# Altium PCB PCB_assembly_drawing_try2.PcbDoc (part 5 of 5)
Units mm, origin at the board's own origin, x right, y up, seen from the top; angles counter-clockwise.
Board outline 187.5 x 240 mm, 2 copper layers (Top Layer, Bottom Layer), stack 2.8 mm thick; 485 components, 419 nets, 1569 pads, 683 vias.
Unrouted connection lines stored in the file: 11.
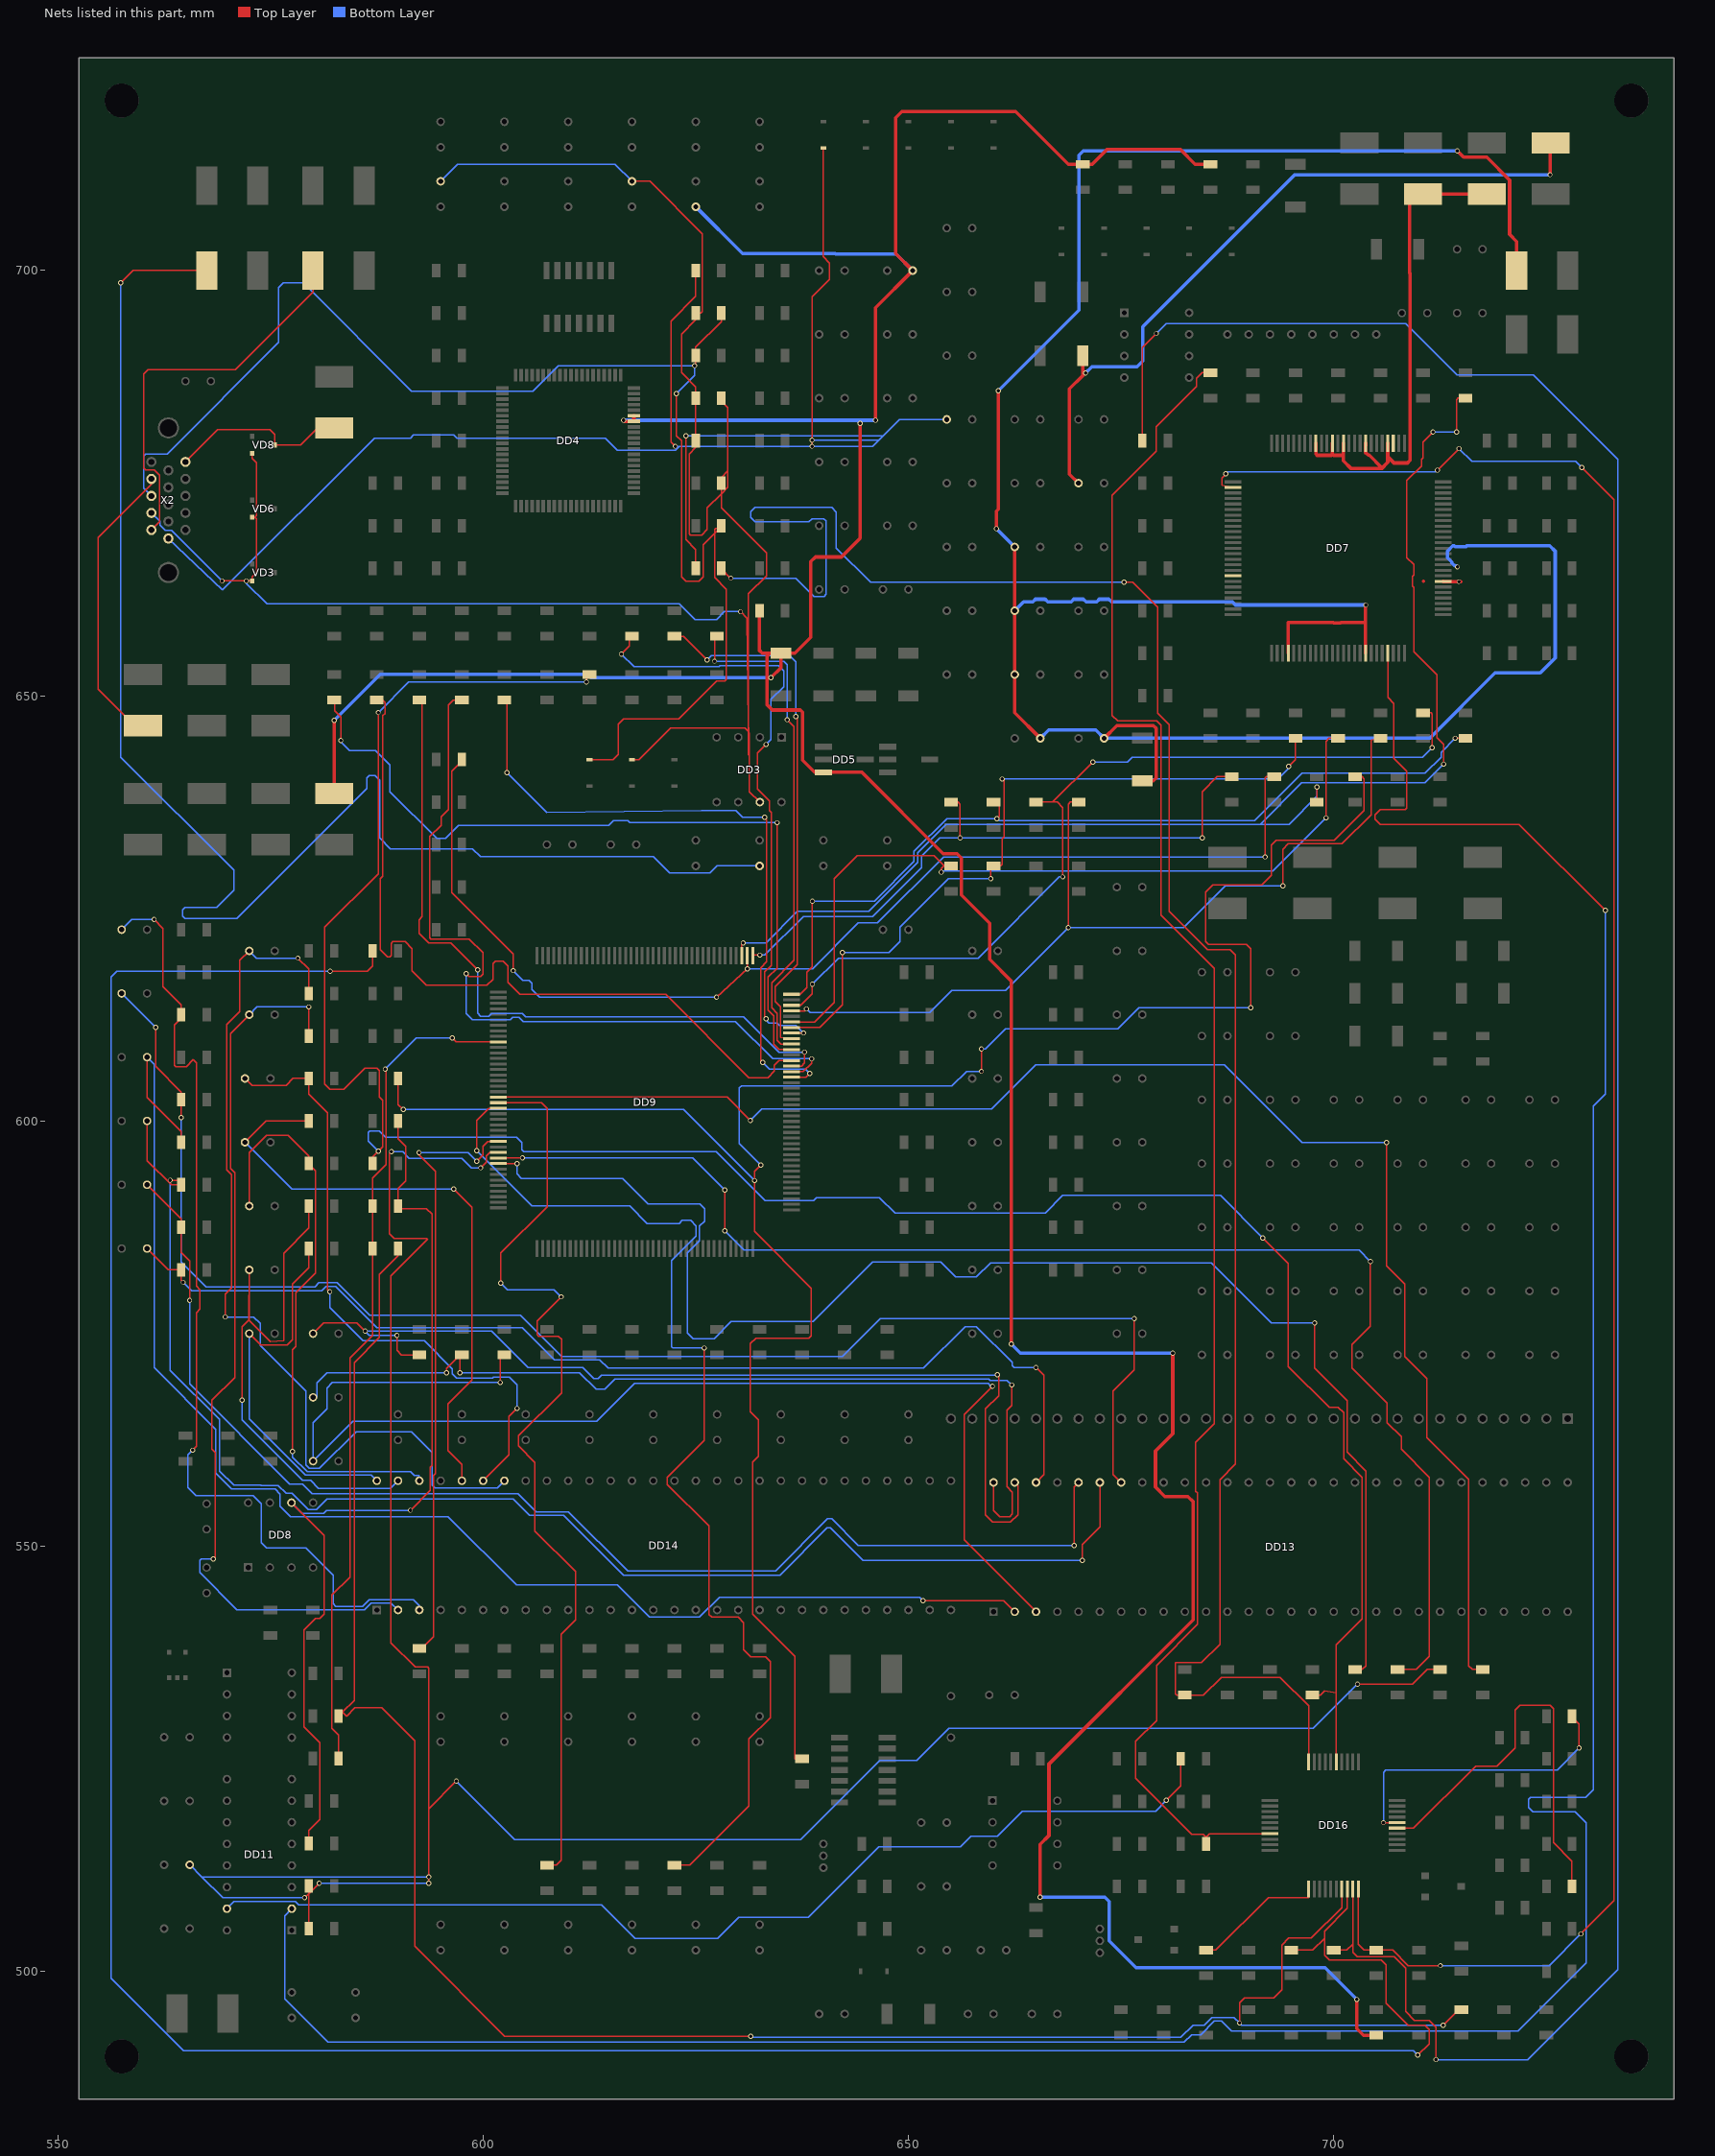
[diagram p5: the nets of this part, all layers, seen from the top]

## Via types
v1: diameter 0.6, hole 0.4, Top Layer to Bottom Layer, 677 vias
v2: diameter 0.5, hole 0.4, Top Layer to Bottom Layer, 3 vias
v3: diameter 0.4, hole 0.4, Top Layer to Bottom Layer, 2 vias
v4: diameter 0.6, hole 0.3, Top Layer to Bottom Layer, 1 vias

## Nets (pads, with @x,y where several pads share a name; then routed paths per layer and width w, separated by ;. In a path a pad name is that pad's centre, name@x,y a point inside that pad or via, vN(x,y) a via of type N, cw(c..) or ccw(c..) an arc to the next point about the centre after c; other vN are vias at no path point) (continued)
O3_3V: C43.1 C46.2 C48.2 C51.2 C53.2 C54.2 DD7.18 DD7.29 DD7.43 DD7.57 DD7.78 L14.2 | length 309.2
  Top Layer w0.4: v1(660.349,669.651) 660.349,671.706 660.571,671.928 v1(660.571,685.87) ; C54.2@662.5,667.5 C53.2@662.5,660 C51.2@662.5,652.5 662.5,648 C48.2@665.5,645 ; C46.2@673,645 674.506,646.506 678.79,646.506 679.12,646.176 679.12,640.334 678.786,640 C43.1@677.5,640 ; DD7.29@694.65,655 694.65,658.6 699.934,658.6 699.989,658.545 700.811,658.545 700.866,658.6 703.7,658.6 703.75,658.55 ; DD7.43@703.75,655 703.75,658.55 ; v1(703.758,660.679) 703.75,660.672 703.75,658.55 ; DD7.57@712.85,663.45 712.881,663.419 v2@714.944,663.419 ; v1(714.527,714.07) 715.264,713.334 717.982,713.334 720.674,710.641 720.674,704.253 721.5,703.428 L14.2@721.5,700
  Bottom Layer w0.4: v1(660.349,669.651) C54.2@662.5,667.5 ; v1(660.571,685.87) 670.052,695.35 670.052,713.562 670.56,714.07 v1(714.527,714.07) ; C53.2@662.5,660 663.535,661.035 664.615,661.035 664.938,661.358 666.063,661.358 666.363,661.058 669.137,661.058 669.437,661.358 670.562,661.358 670.885,661.035 672.114,661.035 672.437,661.358 673.562,661.358 673.885,661.035 688.086,661.035 688.442,660.679 v1(703.758,660.679) ; C48.2@665.5,645 666.473,645.973 672.027,645.973 C46.2@673,645 711.294,645 718.972,652.678 724.281,652.678 726.034,654.431 726.034,667.004 725.399,667.639 715.648,667.639 715.547,667.538 714.253,667.538 714.152,667.639 713.994,667.639 713.359,667.004 713.359,666.25 713.892,665.716 713.892,665.615 714.248,665.259 714.418,665.259 v1(714.535,665.142)
  other v2: 714.7,663.4
OSD_B: DD9.22 R190.2 | length 131.9
  Top Layer w0.15: v1(599.237,596.519) 599.237,600.075 600.662,601.5 DD9.22@601.8,601.5 ; R190.2@622.5,512.5 624.307,512.5 631.241,519.434 631.241,527.329 633.755,529.844 633.755,536.448 633.197,537.007 631.444,537.007 630.606,537.845 630.606,541.02 629.971,541.655 626.872,541.655 626.542,541.985 626.542,552.375 621.671,557.246 621.671,558.12 625.983,562.432 v1(625.983,573.303)
  Bottom Layer w0.15: v1(599.237,596.519) 605.717,590.038 617.22,590.038 619.299,587.959 623.068,587.959 623.418,588.309 624.389,588.309 625.033,587.664 625.033,586.486 622.148,583.6 622.148,573.456 622.3,573.303 v1(625.983,573.303)
OSD_CLK: C131.1 DD9.30 R175.2 R176.2 R193.2 | length 302.7
  Top Layer w0.15: v1(579.018,508.66) 579.5,509.142 ; R176.2@579.5,505.04 579.5,509.142 ; R175.2@579.5,510.04 579.5,509.142 ; v1(580.72,510.362) 579.5,509.142 ; v1(589.229,596.392) 589.001,596.163 589.001,586.74 589.534,586.207 593.395,586.207 593.471,586.13 589.153,581.812 589.153,538.658 592.023,535.788 593.471,535.788 593.598,535.661 593.598,519.125 ; v1(593.598,510.362) v1(593.598,511.124) 593.598,519.125 ; v1(596.849,522.376) 593.598,519.125 ; v1(599.721,594.499) 600.362,595.14 600.362,595.866 600.796,596.3 DD9.30@601.8,596.3 ; v1(702.793,533.781) 709.27,533.781 710.989,535.5 R193.2@712.5,535.5
  Bottom Layer w0.15: C131.1@565.5,512.54 566.916,511.124 ; v1(579.018,508.66) 569.38,508.66 566.916,511.124 ; v1(580.72,510.362) v1(593.598,510.362) ; v1(589.229,596.392) 590.55,596.392 591.312,595.63 597.473,595.63 598.604,594.499 v1(599.721,594.499) ; v1(593.598,511.124) 566.916,511.124 ; v1(596.849,522.376) 603.707,515.518 637.337,515.518 646.633,524.815 651.002,524.815 654.761,528.574 697.586,528.574 v1(702.793,533.781)
OSD_G: DD9.21 R191.2 | length 114
  Top Layer w0.15: DD9.21@601.8,602.15 606.839,602.15 607.517,601.472 607.517,589.915 602.082,584.479 v1(602.082,580.923) ; R191.2@607.5,512.5 608.588,512.5 609.168,513.08 609.168,539.648 610.845,541.325 610.845,547.04 606.095,551.79 606.095,559.867 604.171,561.791 604.171,562.998 609.219,568.046 609.219,574.319 608.838,574.7 606.552,574.7 606.349,574.904 606.349,576.478 v1(609.194,579.323)
  Bottom Layer w0.15: v1(602.082,580.923) 602.844,580.161 608.355,580.161 v1(609.194,579.323)
OSD_HS: DD9.31 R194.2 | length 165.8
  Top Layer w0.15: DD9.31@601.8,595.65 v1(604.626,595.65) ; v1(628.396,587.096) v1(628.396,591.871) ; v1(704.317,583.489) 704.317,575.855 702.171,573.71 702.171,570.941 706.272,566.84 706.272,564.54 707.946,562.867 707.946,561.426 711.251,558.121 711.251,537.032 709.719,535.5 R194.2@707.5,535.5
  Bottom Layer w0.15: v1(604.626,595.65) 624.617,595.65 v1(628.396,591.871) ; v1(628.396,587.096) 630.657,584.835 702.97,584.835 v1(704.317,583.489)
OSD_R: DD9.20 R192.2 | length 179.4
  Top Layer w0.15: DD9.20@601.8,602.8 628.697,602.8 v1(631.427,600.07) ; v1(706.196,597.459) 706.196,582.955 708.33,580.822 708.33,572.313 710.946,569.697 710.946,562.762 715.848,557.86 715.848,535.932 716.28,535.5 R192.2@717.5,535.5
  Bottom Layer w0.15: v1(631.427,600.07) 632.778,601.421 659.79,601.421 664.972,606.603 687.121,606.603 696.265,597.459 v1(706.196,597.459)
OSD_VS: DD9.32 R195.2 | length 169
  Top Layer w0.15: DD9.32@601.8,595 603.987,595 v1(603.992,594.995) ; v1(697.763,576.25) 697.763,570.941 701.571,567.134 701.571,561.061 703.783,558.848 703.783,535.94 703.343,535.5 R195.2@702.5,535.5
  Bottom Layer w0.15: v1(603.992,594.995) 603.992,593.781 604.52,593.253 616.376,593.253 619.383,590.245 625.475,590.245 626.034,589.686 626.034,588.239 625.437,587.642 625.437,585.902 624.027,584.492 624.027,575.056 624.662,574.421 627.151,574.421 629.158,576.428 638.785,576.428 645.795,583.438 653.796,583.438 655.574,581.66 657.987,581.66 659.663,583.336 685.597,583.336 692.683,576.25 v1(697.763,576.25)
P3_3V: C41.1 C44.2 L15.2 | length 87
  Top Layer w0.4: C44.2@670,675 668.934,676.066 668.934,686.079 670.5,687.645 670.5,688.273 ; C41.1@670.5,690 670.5,688.273 ; v1(670.814,687.959) 670.5,688.273 ; v1(725.424,711.276) 725.424,715 L15.2@725.5,715
  Bottom Layer w0.4: v1(670.814,687.959) 671.551,688.696 676.885,688.696 677.545,689.356 677.545,693.395 695.427,711.276 v1(725.424,711.276)
P3V3: C16.2 C38.1 C40.1 DD4.34 DD4.35 DD5.3 L12.1 R22.1 R52.1 R53.1 R237.2 | length 492.3
  Top Layer w0.4: v1(582.498,647.116) 582.498,638.5 L12.1@582.5,638.5 ; v1(616.506,682.396) 616.628,682.275 DD4.34@617.722,682.275 DD4.35@617.722,682.925 ; R22.1@632.5,660 632.5,655.32 632.82,655 633.73,655 ; v1(633.832,652.124) 635,653.292 C40.1@635,655 ; v1(644.325,682.037) 644.325,668.528 642.115,666.318 639.064,666.318 638.531,665.785 638.531,656.88 636.651,655 C40.1@635,655 ; v1(646.142,682.396) 646.142,695.642 C38.1@650.5,700 648.504,701.996 648.504,717.973 649.224,718.693 662.61,718.693 668.803,712.5 R52.1@670.5,712.5 671.601,712.5 673.324,714.223 681.995,714.223 683.717,712.5 R53.1@685.5,712.5 ; v1(662.102,573.786) 662.102,616.458 659.536,619.023 659.536,623.265 656.209,626.593 656.209,630.936 655.701,631.444 654.081,631.444 644.525,641 DD5.3@640,641 638.974,641 637.551,642.424 637.551,648.062 637.286,648.327 633.984,648.327 633.4,648.911 633.4,654.67 633.73,655 ; v1(665.48,508.737) 665.48,514.934 666.521,515.976 666.521,524.392 683.454,541.325 683.454,555.244 682.861,555.837 680.152,555.837 679.044,556.946 679.044,561.213 681.076,563.245 v1(681.076,572.719) ; v1(702.716,496.697) 702.716,493.268 703.484,492.5 R237.2@705,492.5 ; 633.73,655 C40.1@635,655
  Bottom Layer w0.4: v1(582.498,647.116) 587.908,652.526 612.294,652.526 612.696,652.124 v1(633.832,652.124) ; v1(616.506,682.396) 643.966,682.396 ; C16.2@625,707.5 630.488,702.012 641.382,702.012 641.44,701.955 648.545,701.955 C38.1@650.5,700 ; v1(644.325,682.037) 643.966,682.396 ; v1(646.142,682.396) 643.966,682.396 ; v1(662.102,573.786) 663.169,572.719 v1(681.076,572.719) ; v1(665.48,508.737) 673.1,508.737 673.608,508.229 673.608,503.58 676.766,500.423 698.991,500.423 v1(702.716,496.697)
PD: DD7.2 DD16.30 R228.2 | length 257.8
  Top Layer w0.15: v1(687.3,676.1) 687.3,676.073 686.841,675.615 686.841,674.729 DD7.2@688.15,674.5 ; DD16.30@702.9,509.7 702.9,503.18 703.58,502.5 R228.2@705,502.5 706.934,502.5 708.749,500.685 v1(712.546,500.685) ; v1(712.191,676.529) v1(714.731,679.069) ; v1(729.056,504.419) 732.968,508.33 732.968,673.049 v1(729.183,676.834)
  Bottom Layer w0.15: v1(687.3,676.1) 687.327,676.1 687.553,676.326 711.987,676.326 v1(712.191,676.529) ; v1(712.546,500.685) 725.322,500.685 v1(729.056,504.419) ; v1(714.731,679.069) 716.229,677.57 728.447,677.57 v1(729.183,676.834)
PDO: DD16.29 R57.2 R227.2 | length 308.1
  Top Layer w0.15: R57.2@677.5,680 677.5,690.956 v1(679.151,692.607) ; R227.2@700,502.5 701.548,502.5 702.25,503.202 ; DD16.29@702.25,509.7 702.25,503.202 ; v1(712.013,489.636) 712.013,493.446 711.2,494.259 709.498,494.259 708.457,495.3 708.457,500.405 707.137,501.725 702.767,501.725 702.25,502.242 702.25,503.202
  Bottom Layer w0.15: v1(679.151,692.607) 680.294,693.75 708.482,693.75 714.527,687.705 723.468,687.705 733.374,677.799 733.374,500.202 722.808,489.636 v1(712.013,489.636)
PKA_GND: DD7.79 DD7.83 DD7.87 DD7.89 DD7.92 L16.2 L17.2 | length 63.5
  Top Layer w0.4: DD7.92@697.9,679.7 697.9,678.434 698.052,678.282 699.698,678.282 699.85,678.434 ; DD7.89@699.85,679.7 699.85,678.434 ; DD7.87@701.15,679.7 701.15,678.434 701.142,678.426 ; DD7.83@703.754,679.7 703.754,679.429 703.75,679.425 703.75,678.569 703.842,678.477 703.883,678.477 704.059,678.3 704.159,678.3 705.612,676.847 705.612,676.707 ; DD7.79@706.35,679.7 706.35,678.102 ; L16.2@718,709 L17.2@710.5,709 708.939,709 708.939,699.719 708.965,699.694 708.965,677.672 708.668,677.375 707.077,677.375 706.35,678.102 ; 699.85,678.434 700.002,678.282 700.998,678.282 701.142,678.426 ; 701.142,678.426 701.142,677.621 702.056,676.707 705.612,676.707 ; 705.612,676.707 706.35,677.445 706.35,678.102
POWER_ON_OFF: DD16.21 R211.2 | length 15.6
  Top Layer w0.15: R211.2@685,502.5 686.13,502.5 692.319,508.689 697.05,508.689 DD16.21@697.05,509.7
PSC0: DD16.35 R220.2 | length 49
  Top Layer w0.15: DD16.35@707.45,516.85 709.365,516.85 716.672,524.157 719.178,524.157 721.309,526.288 721.309,530.758 721.868,531.317 725.424,531.317 725.83,530.911 725.83,515.148 728,512.978 R220.2@728,510
PSC1: DD16.36 R210.2 | length 35.8
  Top Layer w0.15: v1(705.841,517.5) DD16.36@707.45,517.5 ; R210.2@728,530 728,529.946 728.853,529.093 v1(728.853,526.263)
  Bottom Layer w0.15: v1(705.841,517.5) 705.841,523.392 706.12,523.672 726.262,523.672 v1(728.853,526.263)
R_IN: L6.1 VD8.3 X2.1 | length 21.4
  Top Layer w0.15: X2.1@565,677.5 568.779,681.279 574.941,681.279 575.5,680.72 VD8.3@575.5,679.5 575.5,679.475 578.569,679.475 580.593,681.5 L6.1@582.5,681.5
R_INA0: DD9.105 R48.2 | length 79.1
  Top Layer w0.15: R48.2@602.5,649.5 602.793,649.5 v1(602.793,640.969) ; v1(632.875,606.874) 632.621,607.128 632.621,617.99 633.349,618.719 633.349,635.457 v1(633.095,635.711) ; DD9.105@636.25,605.15 637.958,605.15 v1(638.404,605.596)
  Bottom Layer w0.15: v1(602.793,640.969) 607.459,636.303 625.676,636.499 629.717,636.499 630.504,635.711 v1(633.095,635.711) ; v1(632.875,606.874) 633.654,606.095 637.905,606.095 v1(638.404,605.596)
R_INA1: DD9.106 R47.2 | length 92.9
  Top Layer w0.15: R47.2@597.5,649.5 596.468,649.5 595.912,648.944 595.912,636.616 595.045,635.75 595.045,634.771 593.725,633.451 593.725,621.538 593.852,621.411 598.373,621.411 599.999,619.785 599.999,617.291 599.694,616.987 598.327,616.987 v1(597.992,617.322) ; DD9.106@636.25,605.8 637.613,605.8 638.607,606.794 v1(638.607,607.314)
  Bottom Layer w0.15: v1(597.992,617.322) 597.992,612.648 598.72,611.92 603.197,611.92 603.496,612.22 604.234,612.22 604.741,611.712 629.654,611.712 634.052,607.314 v1(638.607,607.314)
R_INA2: DD9.107 R46.2 | length 85.2
  Top Layer w0.15: R46.2@592.5,649.5 592.811,649.5 592.811,624.019 592.461,623.669 592.461,622.059 593.584,620.936 596.207,620.936 v1(599.364,617.779) ; DD9.107@636.25,606.45 637.438,606.45 637.794,606.806 v1(637.794,608.101)
  Bottom Layer w0.15: v1(599.364,617.779) 599.364,612.678 599.718,612.324 600.67,612.324 600.97,612.624 604.582,612.624 604.981,612.225 630.64,612.225 634.763,608.101 v1(637.794,608.101)
R_INA3: DD9.108 R45.2 | length 94.6
  Top Layer w0.15: R45.2@587.5,649.5 588.188,649.5 588.461,649.227 588.461,647.92 588.211,647.67 588.211,628.802 587.883,628.474 587.883,620.166 588.772,619.277 589.026,619.277 589.204,619.455 589.204,620.903 589.382,621.081 590.829,621.081 591.642,620.268 591.642,617.677 593.344,615.975 600.456,615.975 601.142,616.661 601.142,618.49 601.421,618.769 602.361,618.769 602.894,618.236 602.894,616.306 604.32,614.88 621.45,614.88 631.225,605.104 633.476,605.104 634.238,605.866 634.238,606.552 634.786,607.1 DD9.108@636.25,607.1
R_INA4: DD9.110 R44.2 | length 93.1
  Top Layer w0.15: R44.2@582.5,649.5 582.524,649.5 582.524,648.259 583.26,647.522 v1(583.26,644.728) ; v1(634.554,635.076) 634.554,617.968 633.511,616.924 633.511,613.033 634.156,612.388 634.156,609.041 634.797,608.4 DD9.110@636.25,608.4
  Bottom Layer w0.15: v1(583.26,644.728) 583.26,644.59 584.316,643.534 587.349,643.534 589.038,641.845 589.038,638.734 594.544,633.228 595.602,633.228 597.126,634.752 614.747,634.752 615.304,635.309 617.034,635.309 617.267,635.076 v1(634.554,635.076)
R_INA5: DD9.111 R43.2 | length 59.7
  Top Layer w0.15: v1(627.202,654.075) 627.202,657 R43.2@627.5,657 ; v1(635.762,647.192) 636.549,646.405 636.549,618.89 633.915,616.255 633.915,613.317 634.56,612.672 634.56,609.49 635,609.05 DD9.111@636.25,609.05
  Bottom Layer w0.15: v1(627.202,654.075) 635.356,654.075 635.762,653.669 v1(635.762,647.192)
R_INA6: DD9.112 R42.2 | length 62.8
  Top Layer w0.15: R42.2@622.5,657 623.541,657 v1(626.313,654.228) ; DD9.112@636.25,609.7 634.964,609.814 634.964,613.41 634.319,614.055 634.319,615.788 636.956,618.425 636.956,647.395 v1(636.778,647.573)
  Bottom Layer w0.15: v1(626.313,654.228) 626.821,654.736 636.016,654.736 636.778,653.974 v1(636.778,647.573)
R_INA7: DD9.113 R41.2 | length 72.6
  Top Layer w0.15: v1(616.255,654.914) 617.195,655.853 617.195,657 R41.2@617.5,657 ; v1(633.269,644.267) 632.257,643.255 632.257,639.039 633.635,637.66 633.635,636.495 633.863,636.267 633.863,618.293 633.107,617.536 633.107,612.179 v1(633.273,612.013) ; DD9.113@636.25,610.35 v1(637.657,610.35)
  Bottom Layer w0.15: v1(616.255,654.914) 617.728,653.44 627.73,653.44 627.831,653.542 634.721,653.542 635.341,652.922 635.341,651.069 633.847,649.576 633.847,644.845 v1(633.269,644.267) ; v1(633.273,612.013) 633.273,611.886 633.631,611.528 634.56,611.528 634.871,611.218 636.789,611.218 v1(637.657,610.35)
R_INB0: DD9.114 R65.2 R107.2 | length 86.5
  Top Layer w0.15: DD9.114@636.25,611 639.568,611 642.239,613.671 v1(642.239,619.811) ; v1(659.689,628.498) 659.689,630 R65.2@660,630 660.844,630 661.018,630.174 661.018,633.188 661.244,633.415 661.244,640.08 661.117,640.207 v1(661.035,640.207) ; v1(694.715,641.703) 695.503,642.491 695.503,645 R107.2@695.5,645
  Bottom Layer w0.15: v1(642.239,619.811) 647.7,619.811 649.016,621.127 649.016,622.808 654.706,628.498 v1(659.689,628.498) ; v1(661.035,640.207) 693.448,640.207 694.715,641.475 v1(694.715,641.703)
R_INB1: DD9.115 R64.2 R106.2 | length 95.2
  Top Layer w0.15: DD9.115@636.25,611.65 638.967,611.65 641.248,613.931 641.248,628.472 643.971,631.194 652.986,631.194 654.181,630 ; v1(653.847,629.26) 653.847,629.666 654.181,630 ; R64.2@655,630 654.181,630 ; v1(699.084,635.635) 699.084,644.652 699.432,645 R106.2@700.5,645
  Bottom Layer w0.15: v1(653.847,629.26) 653.999,629.412 692.861,629.412 v1(699.084,635.635)
R_INB2: DD9.117 R63.2 R105.2 | length 106.4
  Top Layer w0.15: DD9.117@636.25,612.95 637.766,612.95 v1(637.997,613.181) ; v1(668.782,622.732) 668.782,637.246 669.036,637.5 R63.2@670,637.5 ; v1(694.03,627.634) 694.03,631.952 694.665,632.587 700.98,632.587 704.418,636.025 704.418,644.822 R105.2@705.5,645
  Bottom Layer w0.15: v1(637.997,613.181) 638.446,612.733 652.492,612.733 655.109,615.349 661.399,615.349 v1(668.782,622.732) 682.37,622.732 687.272,627.634 v1(694.03,627.634)
R_INB3: DD9.118 R61.2 R104.2 | length 102.8
  Top Layer w0.15: DD9.118@636.25,613.6 637.334,613.6 638.708,614.974 v1(638.708,616.102) ; R61.2@665,637.5 666.964,637.5 ; v1(668.147,628.701) 668.147,636.854 667.501,637.5 666.964,637.5 ; v1(671.673,642.209) 666.964,637.5 ; R104.2@710.5,648 711.454,648 711.581,647.873 v1(711.581,643.894)
  Bottom Layer w0.15: v1(638.708,616.102) 641.756,619.15 658.19,619.15 667.741,628.701 v1(668.147,628.701) ; v1(671.673,642.209) 675.769,642.209 676.307,642.747 710.434,642.747 v1(711.581,643.894)
R_INB4: DD9.120 R60.2 R103.2 | length 101.2
  Top Layer w0.15: DD9.120@636.25,614.9 637.267,614.9 638.079,615.713 638.079,617.493 638.708,618.122 v1(638.708,625.856) ; R60.2@660,637.5 660.654,637.5 660.654,635.813 v1(660.4,635.559) ; v1(714.266,645) R103.2@715.5,645
  Bottom Layer w0.15: v1(638.708,625.856) 645.998,625.856 650.645,630.502 650.645,631.698 654.505,635.559 v1(660.4,635.559) 660.658,635.301 690.698,635.301 696.277,640.88 710.731,640.88 712.614,642.762 712.614,643.348 v1(714.266,645)
R_INB5: DD9.121 R58.2 R102.2 | length 74.2
  Top Layer w0.15: DD9.121@631.7,619.45 631.7,619.506 v1(632.536,619.506) ; R58.2@655,637.5 655.828,637.5 656.082,637.246 v1(656.082,633.298) ; v1(684.53,633.298) 684.53,638.722 686.308,640.5 R102.2@688,640.5
  Bottom Layer w0.15: v1(632.536,619.506) 633.12,619.506 637.639,624.025 645.793,624.025 651.552,629.784 651.552,631.149 653.7,633.298 v1(656.082,633.298) v1(684.53,633.298)
R_INB6: DD9.122 R55.2 R101.2 | length 137.1
  Top Layer w0.15: R55.2@597.5,642.5 597.5,642.341 596.316,641.156 596.316,626.872 603.529,619.658 v1(603.529,617.687) ; v1(627.431,614.553) v1(631.05,617.897) DD9.122@631.05,619.45 ; v1(691.921,631.057) 691.921,640.334 692.087,640.5 R101.2@693,640.5
  Bottom Layer w0.15: v1(603.529,617.687) 604.663,616.554 605.377,616.554 605.727,616.204 605.727,615.489 606.663,614.553 v1(627.431,614.553) ; v1(631.05,617.897) 638.725,617.897 644.119,623.291 646.346,623.291 654.113,631.057 v1(691.921,631.057)
R_INB7: DD9.123 R54.2 R100.2 | length 154.2
  Top Layer w0.15: DD9.123@630.4,619.45 630.4,620.748 v1(630.58,620.928) ; R100.2@698,637.5 698.017,637.5 v1(698.017,639.267) ; v1(711.657,680.999) 710.496,679.838 710.496,677.996 710.306,677.806 710.306,677.007 708.59,675.291 708.59,667.823 708.59,667.252 708.59,666.248 709.407,665.43 709.407,664.2 709.232,664.024 709.232,662.916 709.407,662.741 709.407,655.194 712.114,652.487 712.114,645.109 712.927,644.296 v1(712.927,641.96) ; v1(714.426,680.999) 714.426,684.797 714.629,685 R54.2@715.5,685
  Bottom Layer w0.15: v1(630.58,620.928) 633.247,620.928 636.956,624.637 645.35,624.637 651.104,630.39 651.104,631.563 654.438,634.897 691.361,634.897 ; v1(698.017,639.267) 698.017,638.175 694.739,634.897 691.361,634.897 ; v1(711.657,680.999) v1(714.426,680.999) ; v1(712.927,641.96) 710.734,639.767 696.231,639.767 691.361,634.897
RA0: C127.2 DD14.50 R168.1 | length 109.3
  Top Layer w0.15: v1(569.671,576.961) 569.671,579.628 570.402,580.359 570.402,593.706 569.874,594.233 569.874,611.327 571.398,612.851 571.398,618.898 C127.2@572.5,620 ; v1(578.231,619.15) 579.5,617.881 R168.1@579.5,615
  Bottom Layer w0.15: v1(569.671,576.961) 573.024,576.961 573.811,576.174 573.811,573.583 579.171,568.223 579.171,559.562 579.562,559.171 580.761,559.171 585.064,563.474 591.566,563.474 594.004,561.035 594.004,557.2 594.333,556.871 601.671,556.871 DD14.50@602.5,557.7 ; C127.2@572.5,620 573.35,619.15 v1(578.231,619.15)
RA1: C125.2 DD14.2 R167.1 | length 106.2
  Top Layer w0.15: v1(568.274,548.513) 568.503,548.742 568.503,561.031 568.117,561.417 568.117,567.152 570.806,569.841 570.806,593.898 570.281,594.423 570.281,610.281 C125.2@572.5,612.5 ; R167.1@579.5,610 v1(579.5,613.41)
  Bottom Layer w0.15: v1(568.274,548.513) 566.849,548.513 566.671,548.335 566.671,546.916 571.06,542.527 586.037,542.527 586.839,543.329 589.171,543.329 DD14.2@590,542.5 ; C125.2@572.5,612.5 573.41,613.41 v1(579.5,613.41)
RA2: C123.2 DD14.51 R166.1 | length 75.3
  Top Layer w0.15: C123.2@572,605 572.836,604.164 576.834,604.164 577.67,605 R166.1@579.5,605 579.5,603.175 581.711,600.964 581.711,580.161 v1(581.965,579.907) ; DD14.51@600,557.7 603.047,560.747 603.047,565.252 v1(603.987,566.191)
  Bottom Layer w0.15: v1(581.965,579.907) 581.965,578.085 585.902,574.148 593.084,574.148 596.392,570.84 596.392,570.281 596.9,569.773 601.116,569.773 601.218,569.874 603.072,569.874 603.987,568.96 v1(603.987,566.191)
RA3: C121.2 DD14.52 R165.1 | length 72.4
  Top Layer w0.15: C121.2@572,597.5 574.5,600 R165.1@579.5,600 ; v1(596.544,591.998) 598.678,589.864 598.678,569.548 595.863,566.733 595.863,561.269 597.5,559.632 DD14.52@597.5,557.7
  Bottom Layer w0.15: C121.2@572,597.5 577.502,591.998 v1(596.544,591.998)
RA4: C119.2 DD14.54 R164.1 | length 68.4
  Top Layer w0.15: C119.2@572.5,590 572.5,596.281 574.548,598.329 577.055,598.329 579.5,595.884 R164.1@579.5,595 579.5,594.919 580.288,594.13 580.288,582.117 577.986,579.815 577.986,573.516 577.596,573.126 v1(577.596,561.137)
  Bottom Layer w0.15: v1(577.596,561.137) 577.596,560.479 579.308,558.767 591.437,558.767 591.912,558.292 592.5,558.292 DD14.54@592.5,557.7
RA5: C116.2 DD14.55 R163.1 | length 68.1
  Top Layer w0.15: v1(571.652,567.182) 571.652,575.793 572.45,576.59 C116.2@572.5,582.5 572.5,576.541 574.975,574.065 576.555,574.192 576.555,584.455 579.5,587.4 R163.1@579.5,590
  Bottom Layer w0.15: v1(571.652,567.182) 571.652,564.856 578.778,557.731 579.707,557.731 580.619,556.819 589.119,556.819 DD14.55@590,557.7
RA6: C113.2 DD14.56 R162.1 | length 45.5
  Top Layer w0.15: C113.2@572.5,575 573.841,573.659 576.961,573.659 577.582,574.28 577.582,580.834 579.5,582.752 R162.1@579.5,585
  Bottom Layer w0.15: C113.2@572.5,575 572.5,564.963 579.1,558.363 586.837,558.363 DD14.56@587.5,557.7
RA7: C110.2 DD14.3 R161.1 | length 115.7
  Top Layer w0.15: v1(561.315,623.697) 562.356,622.656 562.356,615.823 564.5,613.679 R161.1@564.5,612.5 564.5,612.089 563.702,611.291 563.702,606.552 563.855,606.4 565.099,606.4 565.912,607.212 565.914,607.212 566.318,606.808 566.318,580.577 566.722,580.173 566.722,577.869 566.318,577.465 566.318,561.772 v1(565.836,561.289)
  Bottom Layer w0.15: C110.2@557.5,622.5 558.697,623.697 v1(561.315,623.697) ; v1(565.836,561.289) 565.302,560.756 565.302,556.92 566.274,555.949 572.954,555.949 573.938,554.965 573.938,550.418 574.548,549.808 579.171,549.808 582.371,546.608 582.371,543.236 582.676,542.931 585.8,542.931 586.602,543.733 591.825,543.733 592.5,543.058 DD14.3@592.5,542.5
RB0: C107.2 DD13.50 R160.1 | length 174.1
  Top Layer w0.15: v1(561.492,611.008) 561.492,606.425 564.5,603.417 R160.1@564.5,602.5 v1(564.5,600.395) ; DD13.50@675,557.5 674.071,558.429 674.071,568.255 676.554,570.738 v1(676.554,576.783)
  Bottom Layer w0.15: C107.2@557.5,615 v1(561.492,611.008) ; v1(564.5,600.395) 564.5,583.414 567.436,580.478 580.211,580.478 580.713,580.98 582.848,580.98 586.695,577.133 604.401,577.133 609.221,572.313 642.214,572.313 646.684,576.783 v1(676.554,576.783)
RB1: C104.2 DD13.2 R159.1 | length 167.3
  Top Layer w0.15: C104.2@560.5,607.5 560.5,602.754 564.5,598.754 R159.1@564.5,597.5 ; v1(651.713,543.585) 661.215,543.585 DD13.2@662.5,542.3
  Bottom Layer w0.15: C104.2@560.5,607.5 561.34,606.66 561.34,570.992 568.57,563.762 568.57,558.597 570.41,556.757 573.686,556.757 573.714,556.729 575.527,556.729 576.123,556.133 576.123,554.736 577.376,553.483 595.867,553.483 603.903,545.447 615.765,545.447 619.557,541.655 625.45,541.655 627.782,543.987 651.311,543.987 v1(651.713,543.585)
RB2: C101.2 DD13.51 R158.1 | length 169.7
  Top Layer w0.15: C101.2@560.5,600 560.5,595.352 563.372,592.48 564.5,592.48 R158.1@564.5,592.5 564.5,593.039 v1(563.22,593.039) ; v1(670.433,548.335) 670.433,550.189 672.5,552.256 DD13.51@672.5,557.5
  Bottom Layer w0.15: v1(563.22,593.039) 563.22,570.687 569.011,564.896 569.011,558.851 570.687,557.174 573.888,557.174 573.913,557.149 575.92,557.149 576.859,556.209 577.545,556.209 579.463,554.291 580.39,554.291 581.648,555.549 603.563,555.549 605.468,553.644 609.448,553.644 616.483,546.608 634.873,546.608 640.436,552.171 640.842,552.171 644.677,548.335 v1(670.433,548.335)
RB3: C97.2 DD13.52 R157.1 | length 150
  Top Layer w0.15: C97.2@560.5,592.5 564.5,588.5 R157.1@564.5,587.5 564.5,584.556 565.495,583.561 v1(565.495,578.917) ; v1(669.468,550.088) 669.468,556.968 DD13.52@670,557.5
  Bottom Layer w0.15: v1(565.495,578.917) 565.495,569.098 577.266,557.327 578.764,557.327 579.907,556.184 604.088,556.184 606.224,554.048 610.034,554.048 616.991,547.091 634.365,547.091 640.49,553.216 640.99,553.216 644.119,550.088 v1(669.468,550.088)
RB4: C93.2 DD13.54 R156.1 | length 130
  Top Layer w0.15: C93.2@560.5,585 563,582.5 R156.1@564.5,582.5 564.5,581.269 v1(564.744,581.025) ; v1(664.997,571.017) 665.929,570.086 665.929,558.429 DD13.54@665,557.5
  Bottom Layer w0.15: v1(564.744,581.025) 565.734,580.034 581,580.034 581.533,580.568 582.651,580.568 587.53,575.689 604.583,575.689 608.365,571.906 613.715,571.906 614.68,570.941 651.778,570.941 656.666,575.829 658.001,575.829 662.203,571.627 662.203,571.246 662.432,571.017 v1(664.997,571.017)
RB5: C88.2 DD13.55 R155.1 | length 118.1
  Top Layer w0.15: C88.2@580,575 581.25,576.25 585.165,576.25 v1(586.13,575.285) ; v1(589.864,574.777) 589.864,573.024 590.388,572.5 R155.1@592.5,572.5 ; v1(660.451,570.179) 660.612,570.018 660.612,567.698 659.054,566.141 659.054,553.669 659.892,552.831 661.975,552.831 662.864,553.72 662.864,557.136 DD13.55@662.5,557.5
  Bottom Layer w0.15: v1(589.864,574.777) 586.638,574.777 v1(586.13,575.285) 601.015,575.285 605.267,571.033 611.718,571.033 613.029,569.722 613.537,569.722 613.918,570.103 660.375,570.103 v1(660.451,570.179)
RB6: C84.2 DD13.56 R154.1 | length 111
  Top Layer w0.15: v1(595.697,570.408) 595.697,570.916 R154.1@597.281,572.5 ; v1(597.281,570.408) R154.1@597.281,572.5 ; R154.1@597.5,572.5 R154.1@597.281,572.5 ; DD13.56@660,557.5 660,554.228 660.737,553.491 661.924,553.491 662.229,553.796 662.229,556.362 661.571,557.019 661.571,565.988 662.153,566.57 v1(662.153,568.96)
  Bottom Layer w0.15: C84.2@580,567.5 580.443,567.5 580.443,569.217 581.635,570.408 v1(595.697,570.408) ; v1(597.281,570.408) 611.327,570.408 613.283,568.452 614.299,568.452 615.493,569.646 659.46,569.646 659.593,569.513 661.6,569.513 v1(662.153,568.96)
RB7: C80.2 DD13.3 R153.1 | length 148.8
  Top Layer w0.15: v1(602.005,569.239) 602.005,572.5 R153.1@602.5,572.5 ; v1(659.867,568.808) 656.565,565.506 656.565,550.735 DD13.3@665,542.3
  Bottom Layer w0.15: v1(602.005,569.239) 582.27,569.239 581.635,568.604 581.635,566.166 580,564.531 C80.2@580,560 584.667,564.667 613.334,564.667 617.798,569.132 659.365,569.132 659.689,568.808 v1(659.867,568.808)
ROM_SCL: DD16.27 R112.2 R171.1 R223.2 | length 246.6
  Top Layer w0.15: R171.1@583,530.04 583,530.047 R171.1@583.46,530.507 ; R112.2@590,585 590,584.183 587.783,581.966 587.783,574.55 584.835,571.602 584.835,531.882 R171.1@583.46,530.507 ; v1(631.444,492.379) 602.544,492.379 591.947,502.976 591.947,527.101 588.061,530.987 584.911,530.987 583.946,530.022 R171.1@583.46,530.507 ; v1(688.924,493.928) 688.924,496.316 689.483,496.875 692.937,496.875 693.903,497.84 693.903,503.098 694.72,503.915 697.373,503.915 700.95,507.492 DD16.27@700.95,509.7 ; v1(712.854,493.674) 714.68,495.5 R223.2@715,495.5
  Bottom Layer w0.15: v1(631.444,492.379) 631.571,492.252 682.028,492.252 683.45,493.674 684.792,493.674 685.698,494.58 688.272,494.58 v1(688.924,493.928) 689.178,493.674 v1(712.854,493.674)
ROM_SCL_ASIC: DD9.10 R112.1 R116.1 R172.1 | length 99.1
  Top Layer w0.15: R172.1@583,525.04 583,527.812 582.225,528.587 582.225,544.252 584.327,546.354 584.327,572.139 587,574.812 R112.1@587,585 R116.1@587,590 587,593.268 588.594,594.862 588.594,605.993 v1(588.493,606.095) ; v1(596.386,609.752) 596.839,609.3 DD9.10@601.8,609.3
  Bottom Layer w0.15: v1(588.493,606.095) 592.15,609.752 v1(596.386,609.752)
ROM_SCL_EEPROM: DD8.6 R110.2 R116.2 R174.2 | length 110.1
  Top Layer w0.15: DD8.6@577.46,555.12 581.304,551.276 581.304,542.036 580.796,541.528 580.288,541.528 578.917,540.156 578.917,528.752 580.796,526.872 580.796,517.856 579.5,516.56 R174.2@579.5,515.04 ; R110.2@590,600 590,597.916 590.88,597.036 590.88,592.938 590,592.057 R116.2@590,590 590,589.712 593.344,589.712 594.008,589.048 594.008,559.523 593.767,559.282 593.767,556.556 v1(591.439,554.228)
  Bottom Layer w0.15: DD8.6@577.46,555.12 578.693,553.887 581.233,553.887 581.574,554.228 v1(591.439,554.228)
ROM_SDA: DD16.28 R113.2 R225.2 | length 343.7
  Top Layer w0.15: v1(582.016,617.601) 586.365,617.601 587,618.236 R113.2@587,620 ; R225.2@695,502.5 697.509,502.5 698.906,503.897 ; DD16.28@701.6,509.7 701.6,507.417 698.906,504.723 698.906,503.897 ; v1(709.877,490.169) 711.202,491.495 711.202,493.187 710.692,493.697 708.739,493.697 706.145,496.291 706.145,500.788 705.612,501.321 699.489,501.321 698.906,501.904 698.906,503.897
  Bottom Layer w0.15: v1(582.016,617.601) 556.92,617.601 556.26,616.941 556.26,499.186 564.769,490.677 709.369,490.677 v1(709.877,490.169)
SCDT: DD16.17 R56.2 R201.2 | length 201.9
  Top Layer w0.15: R201.2@685,515 685,515.811 ; R56.2@685.5,688 684.52,688 683.844,687.324 683.844,686.359 679.106,681.62 679.106,678.75 673.938,673.583 673.938,647.7 674.599,647.04 679.196,647.04 679.704,646.532 679.704,624.182 685.952,617.934 685.952,564.413 683.767,562.228 683.767,556.483 683.983,556.267 683.983,540.817 679.171,536.004 679.171,529.514 676.707,527.05 676.707,522.732 683.311,516.128 684.683,516.128 685,515.811 ; DD16.17@692.5,516.2 685.389,516.2 685,515.811
VCLK00: DD9.28 R196.2 | length 71.5
  Top Layer w0.15: v1(592.455,596.29) 592.328,596.163 594.412,594.079 594.412,558.547 594.171,558.306 594.171,539.36 592.811,538 R196.2@592.5,538 ; v1(599.237,595.261) 599.962,595.986 599.962,597.016 600.546,597.6 DD9.28@601.8,597.6
  Bottom Layer w0.15: v1(592.455,596.29) 598.207,596.29 v1(599.237,595.261)
VCLK01: R99.2 R169.1 R197.2 | length 255.4
  Top Layer w0.15: R169.1@590,605 590,601.946 v1(590.601,601.345) ; v1(632.638,594.817) 631.901,594.081 v1(631.901,592.988) 631.901,587.019 638.581,580.339 638.581,574.751 638.302,574.472 632.06,574.472 631.425,573.837 631.425,565.804 632.358,564.871 632.358,560.58 631.671,559.892 631.671,542.038 636.651,537.058 636.651,525 R197.2@637.5,525 ; v1(658.571,605.841) v1(658.571,608.457) ; v1(690.245,613.334) 690.245,620.268 689.737,620.776 685.292,620.776 684.962,621.106 684.962,626.897 685.8,627.736 691.54,627.736 692.683,628.879 692.683,632.46 693.217,632.993 700.075,632.993 703.58,636.499 703.58,640.246 703.326,640.5 R99.2@702.5,640.5
  Bottom Layer w0.15: v1(590.601,601.345) 623.545,601.345 v1(631.901,592.988) ; v1(632.638,594.817) 630.123,597.332 630.123,603.885 630.371,604.133 655.111,604.133 656.819,605.841 v1(658.571,605.841) ; v1(658.571,608.457) 659.028,608.457 661.416,610.845 674.624,610.845 677.113,613.334 v1(690.245,613.334)
VGA_CON: DD16.10 R8.2 R187.1 | length 250.2
  Top Layer w0.15: R8.2@628,665 628,664.947 v1(629.118,663.829) ; v1(675.335,663.346) 676.351,663.346 679.272,660.425 679.272,647.979 680.644,646.608 680.644,624.662 685.186,620.12 687.832,620.12 688.442,619.511 688.442,559.665 686.613,557.836 686.613,538.48 684.428,536.296 681.406,536.296 681.406,532.638 681.544,532.5 R187.1@682.5,532.5 684.682,532.5 686.776,534.594 693.674,534.594 697.05,531.218 DD16.10@697.05,524.65
  Bottom Layer w0.15: v1(629.118,663.829) 636.753,663.829 638.912,661.67 640.08,661.67 640.334,661.924 640.334,670.555 640.06,670.829 638.683,670.829 638.312,670.458 631.952,670.458 631.444,670.966 631.444,671.627 631.952,672.135 640.969,672.135 641.528,671.576 641.528,667.36 645.541,663.346 v1(675.335,663.346)
VGA_CONN: C5.1 R1.1 R8.1 VD5.2 X2.10 | length 209.6
  Top Layer w0.15: v1(622.579,679.348) 622.071,679.856 622.071,694.03 625,696.958 R1.1@625,700 ; v1(623.849,680.568) 623.821,680.539 623.821,668.386 625,667.207 R8.1@625,665 ; v1(638.658,679.348) v1(638.658,680.06) 638.658,696.9 640.733,698.975 640.733,700.895 639.978,701.65 639.978,714.4 VD5.2@640,714.4
  Bottom Layer w0.15: X2.10@563,668.5 569.341,662.432 587.22,680.311 591.447,680.311 591.823,680.686 596.558,680.686 596.934,680.311 614.378,680.311 615.798,678.891 622.579,678.891 623.037,679.348 ; v1(622.579,679.348) 623.037,679.348 ; v1(623.849,680.568) 647.014,680.568 ; v1(638.658,680.06) 646.506,680.06 ; C5.1@654.5,682.5 648.947,682.5 647.014,680.568 ; 623.037,679.348 v1(638.658,679.348) 645.795,679.348 646.506,680.06 ; 646.506,680.06 647.014,680.568
VGA_HS: R2.1 R3.2 R7.1 VD2.2 X2.13 | length 173.2
  Top Layer w0.15: VD2.2@612.5,642.5 615.246,642.5 615.874,643.128 615.874,646.684 616.483,647.294 623.011,647.294 627.431,651.713 628.421,651.713 628.599,651.891 628.599,662.534 627.202,663.931 627.202,669.127 ; v1(622.706,685.521) 622.706,680.587 623.316,679.977 623.316,664.007 623.824,663.499 625.348,663.499 625.856,664.007 625.856,667.781 627.202,669.127 ; v1(624.865,688.823) 625,688.957 R3.2@625,690 625,690.982 628,693.982 R2.1@628,695 ; R7.1@628,670 R7.1@628,669.925 ; 627.202,669.127 627.202,669.544 627.355,669.696 R7.1@627.771,669.696 ; 627.202,669.127 R7.1@627.771,669.696 ; R7.1@627.771,669.696 R7.1@628,669.925 ; R7.1@627.771,669.696 628,669.696 R7.1@628,669.925
  Bottom Layer w0.15: X2.13@561,673.5 560.07,674.43 560.07,678.18 560.324,678.434 562.839,678.434 575.97,691.566 575.97,697.992 576.529,698.551 578.866,698.551 591.591,685.825 605.866,685.825 608.863,688.823 v1(624.865,688.823) 624.865,687.68 v1(622.706,685.521)
VGA_SCL: L2.1 X2.15 | length 46.5
  Top Layer w0.15: X2.15@561,669.5 561.95,670.45 561.95,675.945 561.34,676.554 560.324,676.554 560.07,676.808 560.07,687.832 560.578,688.34 570.856,688.34 580,697.484 L2.1@580,700
VGA_SDA: L3.1 X2.12 | length 34.4
  Top Layer w0.15: L3.1@560,646.5 559.003,646.5 554.736,650.767 554.736,668.604 561,674.868 X2.12@561,675.5
VGA_VS: C10.1 C13.1 DD3.7 R2.2 R4.1 R4.2 R5.2 R6.1 VD1.2 VD3.2 VD6.2 VD8.2 X2.14 | length 262.1
  Top Layer w0.15: v1(569.314,663.5) v1(572.152,663.5) VD3.2@572.85,663.5 572.85,663.956 573.38,664.486 573.38,670.814 573.194,671 573.185,671 ; VD6.2@572.85,671 573.185,671 ; VD8.2@572.85,678.5 572.85,677.922 573.38,677.393 573.38,671.195 573.185,671 ; VD1.2@617.5,642.5 618.294,642.5 622.021,646.227 630.758,646.227 631.192,645.793 ; C13.1@617.5,710.5 619.622,710.5 625.78,704.342 625.78,695.198 625.602,695.02 625,695.02 R2.2@625,695 625,694.19 623.316,692.506 623.316,687.992 625,686.308 R4.2@625,685 R5.2@625,680 625,679.196 624.225,678.421 624.225,669.036 624.352,668.909 625.704,668.909 626.339,669.544 626.339,672.084 628,673.745 ; R4.1@628,685 628,684.697 628.777,683.92 628.777,676.442 ; v1(630.25,659.892) 630.987,659.155 631.192,646.809 ; DD3.7@632.54,637.5 631.317,638.723 631.317,643.009 ; 628,673.745 628.777,674.522 628.777,676.442 ; 628,673.745 628,672.099 633.298,666.801 633.298,664.083 631.192,661.977 631.192,646.809 ; 628,673.745 R6.1@628,675 628,675.665 628.777,676.442 ; 631.192,645.793 631.192,643.134 631.317,643.009 ; 631.192,645.793 631.192,646.809 ; 631.192,645.793 631.227,645.758 ; 631.192,646.809 631.227,645.758 ; 631.227,645.758 631.317,645.668 631.317,643.009 ; 631.227,645.758 631.317,643.009
  Bottom Layer w0.15: X2.14@561,671.5 562,670.5 562,670.052 562.61,669.442 563.372,669.442 v1(569.314,663.5) ; v1(572.152,663.5) 572.152,663.211 574.57,660.793 623.075,660.793 624.901,658.967 627.446,658.967 628.371,659.892 v1(630.25,659.892) ; C10.1@595,710.5 596.995,712.495 615.505,712.495 C13.1@617.5,710.5
VLCK00: C37.1 L8.2 | length 180.1
  Top Layer w0.15: v1(557.403,698.576) 558.851,700.024 567.5,700.024 L8.2@567.5,700
  Bottom Layer w0.15: v1(557.403,698.576) 557.403,642.772 570.687,629.488 570.687,627.126 568.655,625.094 564.927,625.094 564.673,624.84 564.673,624.078 564.927,623.824 571.043,623.824 586.314,639.095 586.314,640.334 586.613,640.633 587.273,640.633 587.826,640.08 587.826,633.273 589.083,632.016 598.766,632.016 599.694,631.088 619.989,631.088 621.906,629.171 626.669,629.171 627.494,629.996 632.5,629.996 C37.1@632.5,630
VSYNC_D: DD7.47 DD11.2 | length 363.1
  Top Layer w0.15: DD7.47@706.35,655 706.35,649.803 707.06,649.093 707.06,642.671 708.584,641.147 708.584,636.778 708.431,636.626 705.485,636.626 704.875,636.016 704.875,635.508 705.485,634.898 721.792,634.898 v1(731.926,624.764)
  Bottom Layer w0.15: DD11.2@577.5,507.38 576.656,506.536 576.656,496.799 581.787,491.668 682.422,491.668 683.311,492.557 684.352,492.557 685.972,494.176 686.81,494.176 687.972,493.014 721.69,493.014 729.691,501.015 729.691,517.5 728.396,518.795 723.392,518.795 722.884,519.303 722.884,520.217 723.138,520.471 729.615,520.471 730.529,521.386 730.529,601.777 731.926,603.174 v1(731.926,624.764)
VSYNC_IN: DD11.15 R183.1 | length 124.9
  Top Layer w0.15: v1(680.314,520.116) 682,521.802 R183.1@682,525
  Bottom Layer w0.15: DD11.15@569.88,507.38 570.729,508.229 577.952,508.229 578.333,507.848 613.893,507.848 617.877,503.863 627.561,503.863 630.047,506.349 638.251,506.349 646.532,514.63 656.108,514.63 657.38,515.902 660.428,515.902 663.373,518.847 679.045,518.847 v1(680.314,520.116)
VSYNC_MCU: DD16.5 R18.1 R109.2 R203.1 | length 279.8
  Top Layer w0.15: R109.2@587,595 587,595.782 v1(587.68,596.462) 588.185,596.968 588.185,602.414 587.781,602.818 587.781,605.942 587.502,606.222 586.105,606.222 583.641,603.758 581.965,603.758 581.387,604.336 581.387,622.786 587.664,629.063 v1(587.664,648.04) ; v1(612.14,651.612) 612.14,652.5 R18.1@612.5,652.5 ; v1(691.642,586.257) 694.665,583.235 694.665,571.144 699.476,566.333 700.532,566.333 701.167,565.698 701.167,560.273 703.351,558.089 703.351,541.452 700.3,538.4 700.3,532.759 ; R203.1@697.5,532.5 698.444,532.5 698.932,532.988 700.3,532.759 ; DD16.5@700.3,524.65 700.3,532.759
  Bottom Layer w0.15: v1(587.664,648.04) 591.236,651.612 v1(612.14,651.612) ; v1(587.68,596.462) 586.511,597.631 586.511,598.678 586.664,598.83 587.781,598.83 588.524,598.088 603.942,598.088 604.551,597.478 604.551,596.646 604.774,596.423 627.375,596.423 633.141,590.658 638.825,590.658 639.172,591.005 646.582,591.005 648.416,589.171 666.082,589.171 668.147,591.236 686.664,591.236 v1(691.642,586.257)
pads on no net: DD1.5 DD1.6 DD1.8 DD1.9 DD3.1 DD3.2 DD3.3 DD7.40 DD7.41 DD7.42 DD7.97 DD7.99 DD9.5 DD9.15 DD9.18 DD9.24 DD9.25 DD9.27 DD9.42 DD9.132 DD9.138 DD10.1 DD15.1 DD15.2 DD15.4 DD15.5 DD15.6 DD15.8 DD15.9 DD15.10 X1.7 X1.8 X1.9

## Silkscreen, mask and mechanical layers (free items; w line width, h text height)
Mechanical 7:
  text "BOASFORMAT|А1|101|0|766141733|331102362|1000000000|1:1|" at 0,2540 h0
  text "SET2|Superlayer=MechanicalLayer7|Wsuperlayer=MechanicalLayer8|Layergrid=MechanicalLayer9|Werase=MechanicalLayer11|Layermark=MechanicalLayer12|Layerstamp=MechanicalLayer13|Thinline=0,1|Basicline=0,1|Gridline=0,1|Boardline=0,6|Contourpolygonline=0,3|PcbGridStep=1,25|PcbGridCleareanceAtView=0|PcbGridNumberEach=l4|PcbGridLineEach=l2|PcbGridCountSecondaryStrip=1|PcbGridEnabledStrip=True|PcbSignalGridEnabled=True|PcbSignalShowBukva=True|RealSignalLayerNames=False|PcbGridEnabledBothSide=False|PcbPolarGridEnabled=False|PcbPolarGridAngleStep=10|PcbPolarGridRadialStep=10|SilkShowPad=True|SilkViewName=Слой маркировки|SilkShowHole=True|SilkShowAxis=False|SilkShowBukva=True|SilkShowGrid=False|SolderShowGrid=False|SolderViewName=Слой маски|SolderShowAxis=False|SolderShowBukva=False|MainViewShowGrid=False|MainViewUseShapesDrill=False|ShowBukvaOnSboky=True|Density=2,2|TableName=Таблица 1|RazrezWidth=100|RealLayerNames=False|RazrezShowBukva=False|RazrezBukva=В-В|Sher=Rz 160|Asstoplayer=MechanicalLayer1|Asstoplayer2=None|Assbottomlayer=MechanicalLayer2|Assbottomlayer2=None|AssMinDiameterHoles=2|AssDim=True|AssMech=False|AssSilk=False|AssComponentSilk=False|AssFreeSilk=False|AssSmdPads=False|AssGridEnable=False|Mirror=Horisontal|PcbGridFontSize=5|PcbGridCenterZero=False|TTStampDistance=12|MainFontSize=5|PolyStep=2|PcbDrillDrawingGridEnabled=False|PcbDrillDrawingViewName=Слой сверловки|PcbDrillDrawingShowBukva=False|PcbDrillDrawingShowAxis=False|PcbSignalLayersUseDrill=False|PcbSignalLayersUseShapesDrill=False|PcbSignalLayersShowAxis=False" at 0,0.025 h0
  text "BOASVIADRILLTABLE:none,118110,1,|none,157480,682," at 0,0 h0
  text "2BOASDRILLTABLE:circle0101,236220,Да,498,True,|circle1000,275591,Да,15,True,|circle0010,314961,Да,30,True,|circle1110,787402,Да,2,True,|circle1011,1574803,Нет,4,True," at 0,0 h0
  text "STAMP|Utv|Утв." at 0,0 h0
  text "STAMP|Design|Разраб." at 0,0 h0
  text "STAMP|Check|Пров." at 0,0 h0
  text "STAMP|Normo|Н.контр." at 0,0 h0
  text "STAMP|Tech|Т.контр." at 0,0 h0
  text "STAMP|Var|Нач. отд." at 0,0 h0
  text "STAMP|Проверил|Станкевич" at 0,0 h0
  text "STAMP|Разработал|Соколов" at 0,0 h0
  text "STAMP|Материал1|Стеклотекстолит СФ-2-35Г-1,5" at 0,0 h0
  text "STAMP|Наименование1|Плата печатная" at 0,0 h0
  text "STAMP|Компания1|БГУИР, гр. 750701" at 0,0 h0
  text "STAMP|Обозначение|ГУИР.758717.001" at 0,0 h0
  text "TT0000#  1 *  Размер для справок." at 0,0 h0
  text "TT0001#  2 Плату изготовить комбинированным позитивным методом по ГОСТ 23752-79" at 0,0 h0
  text "TT0002#  3 Шаг координатной сетки 2,5 мм по ГОСТ Р 51040-97. Линии сетки нанесены через одну." at 0,0 h0
  text "TT0003#  4 Класс точности 3 по ГОСТ Р 53429-2009." at 0,0 h0
  text "TT0004#  5 Группа жесткости 3 при верхнем значении температуры окружающей среды (70±2) °С." at 0,0 h0
  text "TT0005#  6 Сведения об элементах проводящего рисунка сведены в таблице 1" at 0,0 h0
  text "TT0006#  7 Позиционные обозначения ИЭТ выполнить краской МКЭ белая ОСТ92-1586-89, шрифт 2.0-ПРЗ по СТБ 992-95 методом шелкографии" at 0,0 h0
  text "TT0007#  8 Маркировать месяц и год изготовления черной краской МКЭ ОСТ4 ГО.054.205 ОМ2 по инструкции И-75-89 шрифтом 3,5 или 5 тип А ГОСТ 2.304-81." at 0,0 h0
  text "TT0008#  9 Предельные отклонения расстояний между центрами отверстий ±0,2 мм, кроме оговоренных особо." at 0,0 h0
  text "TT0009#  10 Обработка отверстий имерсионным оловом JmmPB по ГОСТ Р 56427-2015" at 0,0 h0
  text "TT0010#  11 Покрытие проводников олово PBSmm по ГОСТ P55693-13" at 0,0 h0
  text "TT0011#  12 Печатная плата должна соответствовать ГОСТ Р 53429-2009" at 0,0 h0
  text "TT0012#" at 0,0 h0
Mechanical 13:
  lines w0.1: 8,1976 20,1976 ; 8,2011 20,2011 ; 8,2036 20,2036 ; 8,2061 20,2061 ; 8,2178 20,2178 ; 13,1951 13,2096 ; 13,2118 13,2238 ; 20,2096 8,2096 8,1951 20,1951 ; 20,2118 8,2118 8,2238 20,2238 ; 20,2521 90,2521 90,2535 ; 651,1951 651,2006 836,2006 ; 651,1956 716,1956 ; 651,1961 716,1961 ; 651,1966 716,1966 786,1966 836,1966 ; 651,1971 716,1971 ; 651,1976 716,1976 ; 651,1981 716,1981 ; 651,1986 716,1986 ; 651,1991 716,1991 836,1991 ; 651,1996 716,1996 ; 651,2001 716,2001 ; 658,1981 658,2006 ; 668,1951 668,2006 ; 691,1951 691,2006 ; 706,1951 706,2006 ; 716,1951 716,2006 836,2006 ; 786,1951 786,1991 ; 786,1971 836,1971 ; 786,1986 801,1986 836,1986 ; 790.96,1971 790.96,1986 ; 795.98,1971 795.98,1986 ; 801,1971 801,1991 ; 806.57,1966 806.57,1971 ; 818,1971 818,1991 ; 836,2014 836,2006 ; 20,1951 836,1951 836,2535 20,2535 20,1951
  text "Перв. примен." at 11.975,2197.379 h5.38 r90
  text "Справ. №" at 11.975,2140.785 h5.38 r90
  text "Подп. и дата" at 11.975,2068.966 h5.38 r90
  text "Инв. № дубл." at 11.975,2039.459 h5.38 r90
  text "Взам. инв. №" at 11.975,2014.5 h5.38 r90
  text "Лит." at 790.329,1987.025 h5.38
  text "Масса" at 805.114,1987.025 h5.38
  text "Масштаб" at 820.139,1987.025 h5.38
  text "Подп. и дата" at 11.975,1985.466 h5.38 r90
  text "Изм." at 651.686,1982.025 h5.38
  text "Лист" at 659.026,1982.025 h5.38
  text "№ докум." at 673.274,1982.025 h5.38
  text "Подп." at 694.922,1982.025 h5.38
  text "Дата" at 706.965,1982.025 h5.38
  text "Разраб." at 651.533,1976.771 h5.38
  text "1:1" at 824.818,1976.393 h7.68
  text "Пров." at 651.533,1971.771 h5.38
  text "Т.контр." at 651.533,1966.771 h5.38
  text "Лист" at 787.442,1966.771 h5.38
  text "Листов" at 808.485,1966.771 h5.38
  text "1" at 828.422,1966.771 h5.38
  text "Н.контр." at 651.533,1956.771 h5.38
  text "Инв. № подл." at 11.975,1954.459 h5.38 r90
  text "Утв." at 651.533,1951.771 h5.38
  text "Копировал" at 726.533,1946.771 h5.38
  text "Формат А1" at 807.707,1946.771 h5.38